# Altium PCB Melon S3 FPGA9.PcbDoc (part 2 of 2)
Units mil, origin at the board's own origin, x right, y up, seen from the top; angles counter-clockwise.
Board outline 2597.73 x 2233.03 mil, 2 copper layers (TopLayer, BottomLayer); 117 components, 166 nets, 594 pads, 168 vias.
Unrouted connection lines stored in the file: 3.
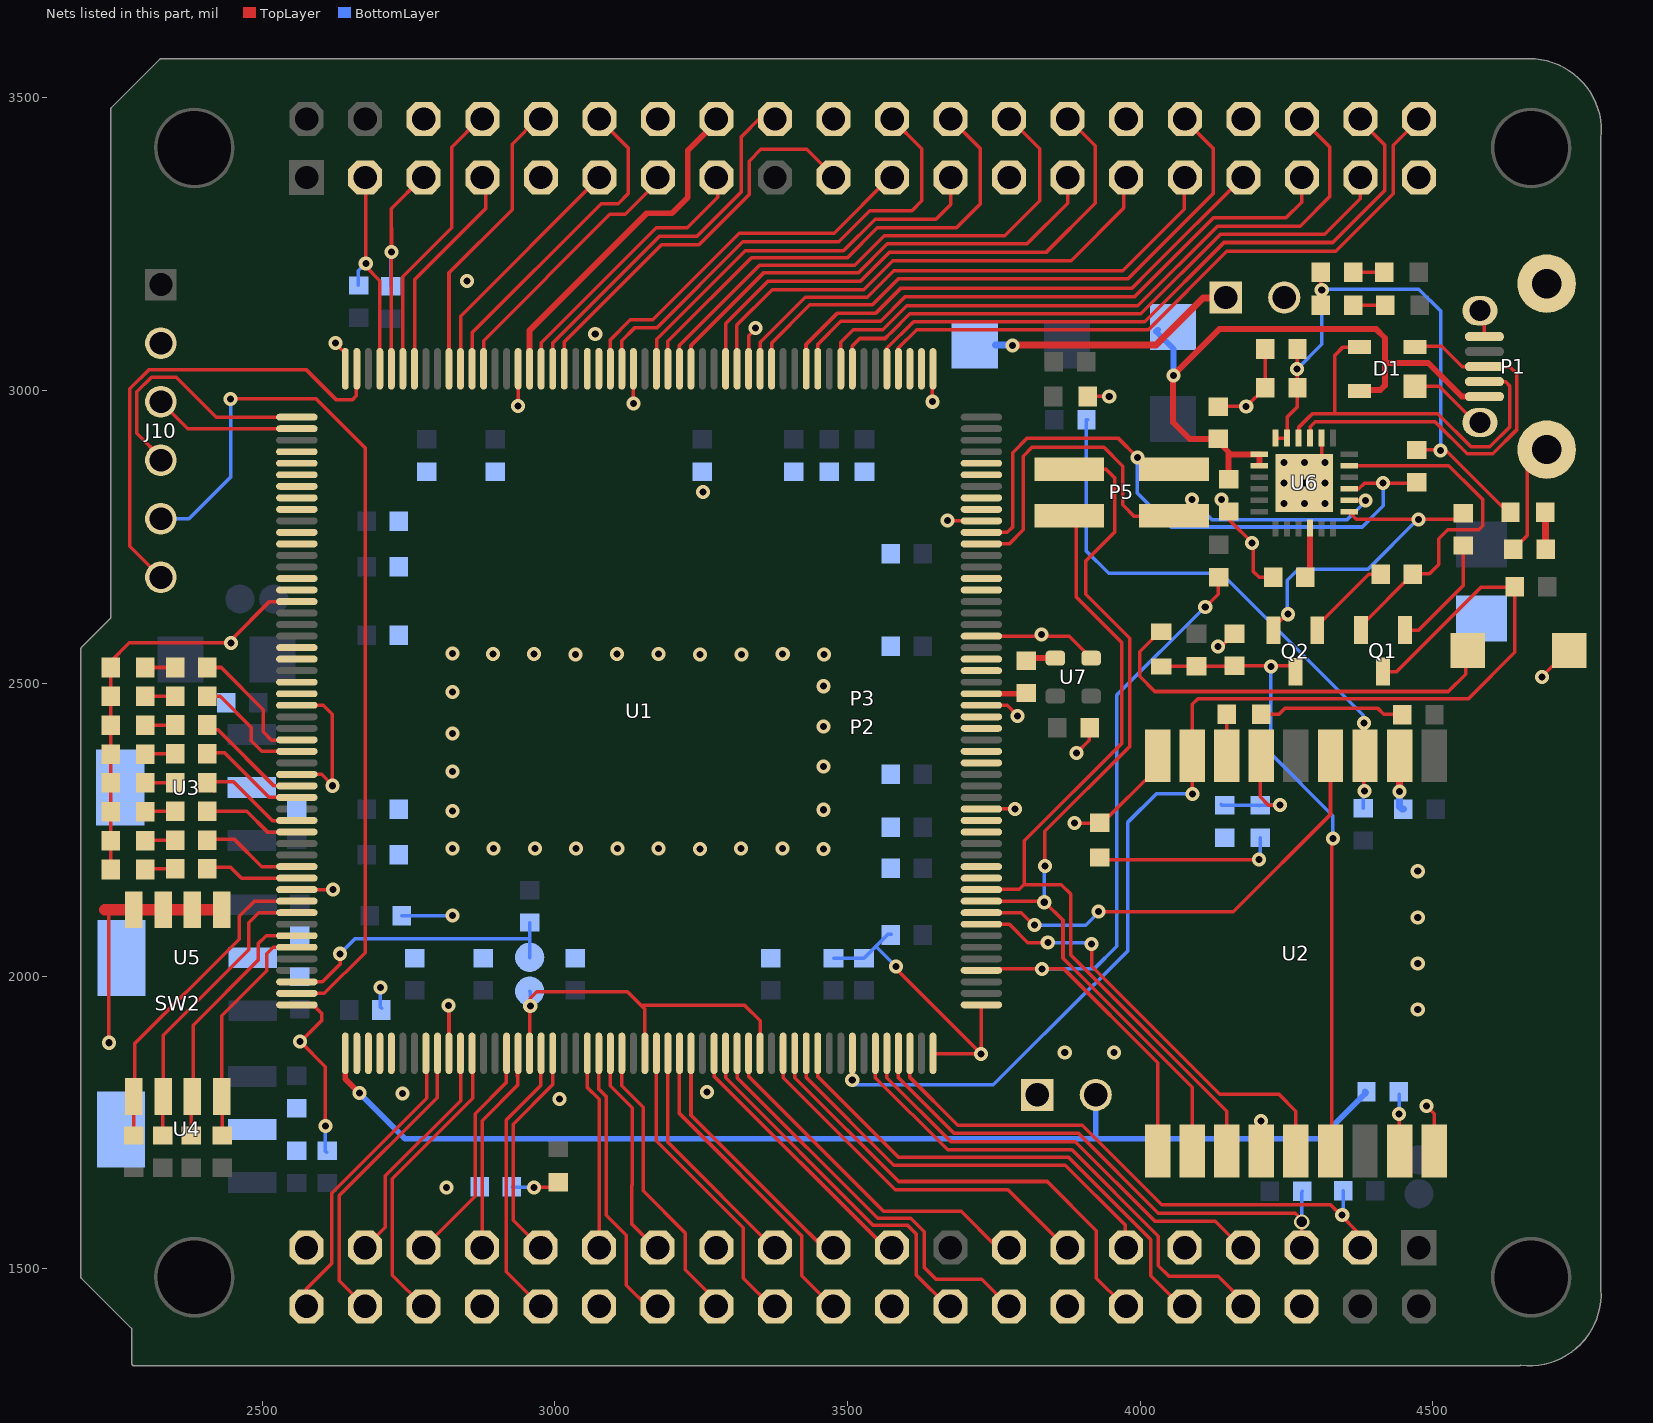
[diagram p2: the nets of this part, all layers, seen from the top]

## Via types
v1: diameter 24, hole 12, TopLayer to BottomLayer, 135 vias
v2: diameter 28, hole 16, TopLayer to BottomLayer, 30 vias
v3: diameter 30, hole 20, TopLayer to BottomLayer, 2 vias
v4: diameter 26, hole 18, TopLayer to BottomLayer, 1 vias

## Nets (pads, with @x,y where several pads share a name; then routed paths per layer and width w, separated by ;. In a path a pad name is that pad's centre, name@x,y a point inside that pad or via, vN(x,y) a via of type N, cw(c..) or ccw(c..) an arc to the next point about the centre after c; other vN are vias at no path point) (continued)
DTR: Q1.2 R18.2 U6.23 | length 600.4
  TopLayer w6: U6.23@4355,2872 U6.23@4355.87,2872.87 ; U6.23@4356.98,2871.76 4527.24,2871.76 4573.5,2825.5 ; Q1.2@4379,2600 4465,2686 R18.2@4465.56,2686 R18.2@4465.56,2687 ; R18.2@4465,2687 R18.2@4465.56,2687 ; 4574,2825 4585,2814 4585,2769 4578,2762 4525,2762 4510,2747 4510,2703 4494,2687 R18.2@4465.56,2687
EN: R1.1 U2.2 | length 101.1
  TopLayer w12: v1(4443,2315) U2.2@4443,2382
  BottomLayer w12: v1(4443,2315) 4443,2289 4447,2285 R1.1@4449.44,2285
ESP_RX: P5.1 U1.62 U2.11 | length 1562.9
  TopLayer w6: U1.62@3728.61,2127.84 3835.16,2127.84 3868,2095 3868,2030.62 3893.31,2005.31 4088.72,1809.89 U2.11@4088.72,1701 ; U1.62@3741,2127 U1.62@3742,2126 ; v1@3837,2189 3837,2247 3982,2392 3982,2577 3907,2652 3907,2709 3956,2758 3956,2851 3941,2866 P5.1@3875,2866
  BottomLayer w6: v1(3836,2126) 3836,2187 v1(3837,2188)
ESP_TX: P5.3 U1.63 U2.12 | length 1434.8
  TopLayer w6: U1.63@3738,2148 3793,2148 3801,2156 3865,2156 3881,2140 3881,2036 4147.78,1769.22 U2.12@4147.78,1701 ; 3802,2157 3802,2231 3968,2397 3968,2570 3891,2647 3891,2783 P5.3@3887,2787
FPGA_CS: Q1.3 R6.1 U1.45 U2.8 | length 2049.3
  TopLayer w6: U2.8@4088,2389 4089,2390 4089,2464 4099,2474 4561,2474 4640,2553 R6.1@4640,2664 ; U2.8@4088.72,2376.2 4088.72,2311.28 v1(4089,2311) ; Q1.3@4414.6,2520.13 4438.13,2520.13 4582,2664 R6.1@4640,2664 ; R6.1@4640,2665 R6.1@4640,2664 ; R6.1@4641,2664 R6.1@4640,2664
  BottomLayer w6: v1(3508,1822) 3508,1814 3749,1814 3920,1985 3921,1985 3979,2043 3979,2263 4027,2311 v1@4088,2311
GCLK: R3.1 U7.3 | length 48.8
  TopLayer w6: R3.1@3807,2541 R3.1@3808.96,2542.96
  TopLayer w10: R3.1@3808.96,2542.96 U7.3@3854.98,2542.96
GND: C1.1 C2.2 C3.2 C4.2 C5.2 C6.2 C7.2 C8.2 C9.2 C10.2 C11.2 C12.2 C13.2 C14.2 C15.2 C17.2 C18.2 C20.2 C21.2 C23.1 C24.2 C25.2 C26.2 C27.2 C28.2 C29.2 C30.2 C31.2 C32.2 C33.2 C34.2 C35.2 C36.2 C37.2 C38.2 C39.2 C40.2 C41.2 D1.1 DC1.C DC2.C DC6.C DC7.C DC8.C DC9.C DC10.C DC11.C DC12.C DC13.C J10.2 JP3.2 P1.1 P1.G1 P1.G2 P1.G3 P1.G4 P2.6 P2.9 P2.14 P2.20 P2.25 P2.30 P2.34 P2.39 P3.6 P3.9 P3.14 P3.20 P3.25 P3.30 P3.34 P3.39 P4.2 P6.1 R9.2 R17.1 R32.2 R33.2 R37.1 SW1.1 SW2.1 SW2.3 SW2.5 SW2.7 U1.10 U1.17 U1.27 U1.37 U1.52 U1.53 U1.70 U1.79 U1.85 U1.95 U1.105 U1.121 U1.131 U1.141 U1.156 U1.173 U1.182 U1.188 U1.198 U1.208 U2.9 U2.13 U2.18 U3.2 U3.4 U4.2 U4.4 U5.2 U5.4 U6.2 U7.2 | length 5122.6
  TopLayer w6: v1(2238,1886) 2238,2112 ; DC1.C@2240,2526 2241.47,2524.53 DC7.C@2241.47,2477.66 DC8.C@2241.47,2428.38 DC9.C@2241.47,2379.11 DC10.C@2241.47,2329.83 DC11.C@2241.47,2280.55 DC12.C@2241.47,2231.28 DC13.C@2241.47,2182 ; DC1.C@2240,2536 2273,2569 v1(2447,2569) ; SW2.1@2281,2110 SW2.1@2284.09,2113.09 ; v1@2447,2572 2447,2574 2512.65,2639.65 U1.173@2559.32,2639.65 ; U1.198@2559.32,2147.53 2621.53,2147.53 v1@2622,2148 ; U1.188@2559.32,2344.38 2601.62,2344.38 2620,2326 2620,2447 2604.51,2462.49 U1.182@2559.32,2462.49 ; v1(2565,1888) v1@2565.5,1887.5 ; U1.208@2590,1951 2590,1948 2602,1936 2602,1924 v1@2565.5,1887.5 ; v1(2608,1744) 2608,1845 v1@2565.5,1887.5 ; v1(2625,3081) 2642,3064 U1.156@2642,3037.29 U1.156@2642,3037 ; v1(2818,1950) 2819.17,1948.83 U1.10@2819.17,1868 ; U1.141@2937.28,3037.29 2937.28,2975.72 v1@2938,2975 ; U1.17@2956.96,1868 v1@2956.96,1949 ; v1(2958,1949) 2958,1962 2969,1973 3124,1973 3150,1947 ; U1.131@3134.13,3037.29 3134.13,2979.87 v1@3135,2979 ; 3150,1948 3153.81,1944.19 U1.27@3153.81,1868 ; 3151,1950 3324,1950 3350.66,1923.34 U1.37@3350.66,1868 ; U1.121@3330.98,3037.29 3330.98,3093.98 v1@3344,3107 ; v1(3583,2016) 3583,2012 v1(3728,1867) ; v1(3645,2981) U1.105@3645,3038 ; U1.52@3647,1868 3648,1867 v1(3728,1867) ; v1(3671,2778) 3728,2778 U1.95@3729,2777 ; U1.70@3728.61,2285.32 3787.68,2285.32 v1@3788,2285 ; U1.79@3728.61,2462.49 3772.51,2462.49 v1@3790,2445 ; U1.85@3728.61,2580.6 3878.4,2580.6 U7.2@3916,2542.96 U7.2@3918,2545 ; U1.53@3730,1951 3728,1949 v1(3728,1867) ; v1(3888,2261) DC2.C@3929,2261 ; v1(3891,2381) 3913,2403 C23.1@3913,2425 ; DC6.C@3910.05,2990 v1(3947,2990) ; DC2.C@3931,2257 4029.67,2355.67 U2.9@4029.67,2376.2 ; C12.2@4132,2973 v1(4181,2973) 4181.44,2973 C3.2@4213.44,3005 ; v1(4133,2563) 4139,2563 C1.1@4161,2585 ; C14.2@4152,2791 4152,2779 v1(4191,2740) 4193,2738 4193,2691 4203,2681 C11.2@4226,2681 ; v1(4206,1752) 4206,1699 U2.13@4207,1698 ; C9.2@4213.44,3071 4213.44,3007.56 C3.2@4216,3005 ; U6.2@4309.74,2919 4309.74,2884.26 U6.2@4316,2878 ; D1.1@4469.24,3007.47 4510.53,3007.47 P1.G3@4573,2945 ; v1(4489,1778) 4502.11,1764.89 U2.18@4502.11,1701 ; P1.G1@4583,3136 4588,3131 P1.1@4588,3092.18 ; R17.1@4637.44,2729 4661,2752.56 4661,2865 P1.G4@4696,2900 ; v1(4686,2511) 4726,2551 SW1.1@4733,2551
  TopLayer w20: 2231,2113.09 SW2.1@2281,2113.09 2284.09,2113.09 SW2.3@2331,2113.09 SW2.5@2381,2113.09 SW2.7@2431,2113.09
  BottomLayer w6: v1(2608,1744) 2608,1701 R32.2@2610,1699 ; v1(2702,1980) 2702,1947 R33.2@2704,1945 ; C17.2@2738.56,2103 2823,2103 v1@2825,2105 ; JP3.2@2957,1974 2958,1973 v1(2958,1949) ; C29.2@3476,2030.56 3527.44,2030.56 C28.2@3528,2030 ; C28.2@3528,2030.56 3568.44,2071 C41.2@3575,2071 ; 3549,2050 v1(3583,2016)
  other v1: 2815,1639 3008,1790 2740,1799 3260,1802 3871,1869 3955,1869 4474,1943 4474,2021 4474,2100 2825,2103 2621,2148 4474,2179 3247.67,2217 3459,2217 2825,2218 2895.44,2218 2965.89,2218 3036.33,2218 3106.78,2218 3177.22,2218 3318.11,2218 3388.56,2218 2825,2282 3459,2284 3786,2285 2620,2325 2825,2349 3459,2358 2825,2414 3459,2426 3790,2444 2825,2485 3459,2495 3035.5,2549 3247.75,2549 3318.5,2549 3460,2549 2894,2550 2964.75,2550 3106.25,2550 3177,2550 3389.25,2550 2825,2551 3831,2583 4245.21,2807.23 4245.21,2807.23 4280.21,2807.23 4280.21,2807.23 4315.21,2807.23 4315.21,2807.23 4139,2814 3253,2827 4245.21,2842.23 4245.21,2842.23 4280.21,2842.23 4315.21,2842.23 4315.21,2842.23 4245.21,2877.23 4245.21,2877.23 4280.21,2877.23 4280.21,2877.23 4315.21,2877.23 2937,2974 3134,2978 3069,3097 3343,3107 2850,3187
INT_B: R15.2 U1.56 U2.10 | length 1371.2
  TopLayer w6: U1.56@3728,2008 3732,2012 v1(3832,2012) 3869.65,2012 4029.67,1851.98 U2.10@4029.67,1701 ; v1(4111,2630) 4133,2652 4133,2683 R15.2@4131.44,2681.44
  BottomLayer w6: v1(3832,2012) 3921,2012 3960,2051 3960,2480 4110,2630 v1(4111,2630)
IO_L01N_0: U1.161
IO_L01N_1: U1.107
IO_L01N_3: U1.3
IO_L01P_0: U1.160
IO_L01P_1: U1.106
IO_L01P_3: U1.2
IO_L02N_0: U1.163
IO_L02N_1: P3.38 U1.109 | length 1141.2
  TopLayer w6: U1.109@3567.2,3037.29 3567.2,3072.2 3612.73,3117.73 4007.73,3117.73 ; 4008,3117.73 4007.73,3117.73 ; P3.38@4371,3466 4418,3419 4418,3342 4329,3253 4143,3253 4007.73,3117.73
IO_L02N_3: U1.5
IO_L02P_0: U1.162
IO_L02P_1: P3.40 U1.108 | length 1129.3
  TopLayer w6: U1.108@3586.88,3037.29 3586.88,3072.88 3618,3104 4014,3104 4148,3238 4334,3238 4432,3336 4432,3419 P3.40@4472,3459
IO_L02P_3: U1.4
IO_L03N_0: U1.165
IO_L03N_1: P3.36 U1.113 | length 1136
  TopLayer w6: U1.113@3488.46,3037.29 3488.46,3082.46 3510,3104 3560.2,3104 3601.2,3145 3996,3145 4132,3281 4273,3281 4324,3332 4324,3416 P3.36@4276,3464
IO_L03N_3: P2.38 U1.9 | length 530.4
  TopLayer w6: P2.38@2675.73,1435.87 2632,1479.6 2632,1625.03 2799,1792.03 U1.9@2799,1879
IO_L03P_0: U1.164
IO_L03P_1: P3.37 U1.112 | length 1046.3
  TopLayer w6: U1.112@3508.14,3037.29 3508.14,3076.14 3521,3089 3564,3089 3573,3098 ; 3573.5,3098.5 3606,3131 4001,3131 4137,3267 4315,3267 4376,3328 P3.37@4376,3364
IO_L03P_3: P2.40 U1.8 | length 517.4
  TopLayer w6: P2.40@2575.73,1435.87 2575.73,1465.73 2619,1509 2619,1629 2781,1791 2781,1865 U1.8@2779.8,1868
IO_L04N_0: U1.168
IO_L04N_1: P3.33 U1.116 | length 885
  TopLayer w6: U1.116@3429,3059 3429,3078.66 3482.85,3132.5 3548.5,3132.5 3591.17,3175.17 3986.37,3175.17 4016.5,3205.3 4016.5,3205.5 4175,3364 P3.33@4176,3364
IO_L04N_3: P2.36 U1.12 | length 507
  TopLayer w6: P2.36@2775.73,1435.87 2722.47,1489.13 2722.47,1653.53 2860,1791.06 2860,1841 2858,1843 U1.12@2858,1863
IO_L04P_0: U1.167
IO_L04P_1: P3.35 U1.115 | length 1011.3
  TopLayer w6: U1.115@3449.09,3037.29 3449.09,3068.91 3449,3069 3449,3078.86 3488.64,3118.5 3556.5,3118.5 3598,3160 3990,3160 4125,3295 4249,3295 4276,3322 P3.35@4276,3364
IO_L04P_3: P2.37 U1.11 | length 399.8
  TopLayer w6: P2.37@2675.73,1535.87 2710.47,1570.61 2710.47,1658.5 2839,1787.03 2839,1866 U1.11@2838.85,1868
IO_L05N_0: U1.172
IO_L05N_1: P3.31 U1.120 | length 918.3
  TopLayer w6: U1.120@3350.66,3037.29 3350.66,3082.66 3427.5,3159.5 3533.5,3159.5 3579,3205 3970,3205 4075,3310 4075,3363 P3.31@4076,3364
IO_L05N_2: U1.65
IO_L05N_3: P2.33 U1.16 | length 379
  TopLayer w6: P2.33@2875.73,1535.87 2875.73,1752.73 2937,1814 U1.16@2937,1855 ; 2936,1828.56 U1.16@2936,1863
IO_L05P_0: U1.171
IO_L05P_1: P3.32 U1.119 | length 1052.7
  TopLayer w6: U1.119@3370.35,3037.29 3370.35,3081.35 3435.5,3146.5 3542.5,3146.5 3587,3191 3979,3191 4125,3337 4125,3413 4075,3463 P3.32@4076,3464
IO_L05P_2: U1.64
IO_L05P_3: P2.35 U1.15 | length 385.9
  TopLayer w6: P2.35@2775.73,1535.87 2863.73,1623.87 2863.73,1764.73 2917,1818 2917,1847 U1.15@2919,1849 ; U1.15@2919,1861 U1.15@2919,1849 ; U1.15@2920,1850 U1.15@2919,1849
IO_L06N_1: P3.28 U1.123 | length 962.5
  TopLayer w6: U1.123@3291.61,3037.29 3291.61,3114.61 3364,3187 3522,3187 3571,3236 3839,3236 3923,3320 3923,3418 P3.28@3873,3468
IO_L06N_2: U1.69
IO_L06N_3: P2.31 U1.19 | length 385.2
  TopLayer w6: P2.31@2975.73,1535.87 2929,1582.6 2929,1747 2996,1814 U1.19@2996,1874
IO_L06P_1: P3.29 U1.122 | length 852
  TopLayer w6: U1.122@3311,3059 3311,3112 3371.5,3172.5 3527.5,3172.5 3577,3222 3882,3222 3972,3312 3972,3363 P3.29@3976,3364
IO_L06P_2: U1.68
IO_L06P_3: P2.32 U1.18 | length 480.9
  TopLayer w6: P2.32@2975.73,1435.87 2917,1494.6 2917,1754 2976,1813 2976,1864 U1.18@2976.65,1868
IO_L07N_0: U1.178
IO_L07N_1: P3.26 U1.127 | length 919.8
  TopLayer w6: U1.127@3212.87,3037.29 3212.87,3077.27 3349.6,3214 3512,3214 3562.56,3264.56 3768.56,3264.56 3828,3324 3828,3413 P3.26@3776,3465
IO_L07N_3: P2.28 U1.23 | length 488.4
  TopLayer w6: U1.23@3075.07,1868 3075.07,1806.9 3087.73,1794.24 3087.73,1591.27 3122,1557 3122,1472 3160,1434 3177,1434 P2.28@3175.73,1435.87
IO_L07P_0: U1.177
IO_L07P_1: P3.27 U1.126 | length 816.9
  TopLayer w6: U1.126@3232.55,3037.29 3232.55,3077.16 3356.4,3201 3518,3201 3567.56,3250.56 3806.56,3250.56 3876,3320 3876,3350 P3.27@3879,3350
IO_L07P_3: P2.29 U1.22 | length 340.7
  TopLayer w6: U1.22@3055.39,1868 3055,1864 3055,1810 3075.73,1789.27 P2.29@3075.73,1535.87
IO_L08N_0: U1.181
IO_L08N_1: P3.23 U1.129 | length 694.3
  TopLayer w6: U1.129@3174,3037 3174,3088 3325,3239 3493,3239 3547,3293 3651,3293 3676,3318 P3.23@3676,3364
IO_L08N_2: U1.75
IO_L08N_3: P2.26 U1.25 | length 501
  TopLayer w6: U1.25@3114.44,1868 3114.44,1812.56 3151,1776 3151,1633 3223,1561 3223,1498 3274,1447 3274,1435 P2.26@3275.73,1435.87
IO_L08P_0: U1.180
IO_L08P_1: P3.24 U1.128 | length 825.5
  TopLayer w6: U1.128@3193,3056 3193,3084 3336,3227 3500,3227 3551,3278 3686,3278 3727,3319 3727,3413 P3.24@3676,3464
IO_L08P_2: U1.74
IO_L08P_3: P2.27 U1.24 | length 368.5
  TopLayer w6: U1.24@3094.76,1868 3094.76,1812.24 3132,1775 3132,1642.97 3131.76,1642.73 3131.76,1576.24 3173,1535 P2.27@3175.73,1535.87
IO_L09N_1: P3.21 U1.133 | length 645.7
  TopLayer w6: U1.133@3095,3037 3095,3087 3129,3121 3167,3121 3315,3269 3477,3269 3572,3364 P3.21@3576,3364
IO_L09N_2: U1.78
IO_L09N_3: P2.23 U1.29 | length 413.6
  TopLayer w6: U1.29@3193.18,1868 3193.18,1715.82 P2.23@3378,1531
IO_L09P_1: P3.22 U1.132 | length 823.5
  TopLayer w6: U1.132@3115,3035 3114,3036 3114,3085 3136,3107 3174,3107 3321,3254 3485,3254 3538,3307 3610,3307 3627,3324 3627,3413 P3.22@3576,3464
IO_L09P_2: U1.77
IO_L09P_3: P2.24 U1.28 | length 521.6
  TopLayer w6: U1.28@3173.5,1868 3173.5,1718.5 3322,1570 3322,1484 3373,1433 P2.24@3375.73,1435.87
IO_L10N_0: R25.2 U1.186 | length 207.5
  TopLayer w6: R25.2@2404,2479 R25.2@2405.85,2477.15 ; R25.2@2406.56,2477.86 2428.14,2477.86 2481,2425 2481,2403 ; 2480.5,2402.5 2499.25,2383.75 U1.186@2559.32,2383.75
IO_L10N_1: U1.135
IO_L10N_3: P2.21 U1.31 | length 445.8
  TopLayer w6: U1.31@3232.55,1868 3232.55,1762.42 3434,1560.97 ; 3434.03,1560.97 3459,1536 P2.21@3479,1536
IO_L10P_0: R24.2 U1.185 | length 210.1
  TopLayer w6: R24.2@2406.56,2527 2430,2527 2502,2455 2502,2417 2516,2403 U1.185@2543,2403
IO_L10P_1: U1.134
IO_L10P_3: P2.22 U1.30 | length 542.7
  TopLayer w6: U1.30@3212.87,1868 3212.87,1765.13 3422,1556 3422,1488 3475,1435 P2.22@3475.73,1435.87
IO_L11N_0: R27.2 U1.190 | length 189.1
  TopLayer w6: R27.2@2406.56,2379.57 2410,2377 2410,2381 2436,2381 2511.99,2305.01 U1.190@2559.32,2305.01
IO_L11N_1: P3.18 U1.138 | length 644.1
  TopLayer w6: U1.138@2996.33,3037.29 2996.33,3081.33 3179,3264 3243,3264 3318,3339 3318,3433 3352,3467 3378,3467 P3.18@3376,3464
IO_L11N_2: U1.83
IO_L11N_3: P2.18 U1.34 | length 627.7
  TopLayer w6: U1.34@3291.61,1868 3291.61,1826.36 3544.05,1573.92 3603.08,1573.92 3617,1560 3617,1490 3671,1436 P2.18@3675,1436
IO_L11P_0: R26.2 U1.189 | length 202.8
  TopLayer w6: R26.2@2406.56,2428.71 2410,2426 2410,2424 2407,2421 2424,2421 2520.31,2324.69 U1.189@2559.32,2324.69
IO_L11P_1: P3.19 U1.137 | length 697.4
  TopLayer w6: U1.137@3016.02,3037.29 3016.02,3083.02 3182.2,3249.2 3246.2,3249.2 3332,3335 3332,3392 3352,3412 3430,3412 3471,3371 P3.19@3471,3361
IO_L11P_2: U1.82
IO_L11P_3: P2.19 U1.33 | length 465.1
  TopLayer w6: U1.33@3271.92,1868 3271.92,1829.08 3564,1537 3576,1537 P2.19@3575.73,1535.87
IO_L12N_0: R29.2 U1.193 | length 182
  TopLayer w6: R29.2@2417.68,2290.7 R29.2@2406.56,2281.29 2473.71,2281.29 2509.05,2245.95 U1.193@2559.32,2245.95
IO_L12N_1: P3.16 U1.140 | length 589.8
  TopLayer w10: U1.140@2956.96,3037.29 2956.96,3102.96 3157,3303 3200,3303 3227,3330 3227,3410 3275,3458 3275,3467 P3.16@3276,3464
IO_L12N_3: P2.15 U1.36 | length 613.7
  TopLayer w6: U1.36@3330.98,1868 3330.98,1828.35 3561.41,1597.92 3694.08,1597.92 3754,1538 3780,1538 P2.15@3775.73,1535.87
IO_L12P_0: R28.2 U1.192 | length 211.8
  TopLayer w6: R28.2@2405,2336 R28.2@2409,2332 ; R28.2@2406.56,2330.43 2407.99,2331.35 R28.2@2409,2332 ; R28.2@2417,2316 R28.2@2417,2332 ; U1.192@2559.32,2265.64 2517.36,2265.64 2451,2332 R28.2@2417,2332 ; R28.2@2409,2332 R28.2@2417,2332 ; R28.2@2409,2332 2410,2333 2417,2333 R28.2@2417,2332
IO_L12P_1: P3.15 U1.139 | length 477.6
  TopLayer w6: U1.139@2976.65,3037.29 2976.65,3081.65 3173,3278 3226,3278 3278,3330 P3.15@3278,3359
IO_L12P_3: P2.16 U1.35 | length 703
  TopLayer w6: U1.35@3311.29,1868 3311.29,1825.88 3551.25,1585.92 3608.05,1585.92 3631,1562.97 3631,1502 3651,1482 3729,1482 P2.16@3775,1436
IO_L13N_0: R31.2 U1.197 | length 161.9
  TopLayer w6: R31.2@2406,2182 2406.48,2182.85 R31.2@2406.56,2183 ; R31.2@2408,2182 2412,2186 2446,2186 2464.79,2167.21 U1.197@2559.32,2167.21
IO_L13N_1: P3.12 U1.145 | length 598.6
  TopLayer w6: U1.145@2858.54,3037.29 2858.54,3098.54 3079,3319 3108,3319 3125,3336 3125,3415 P3.12@3076,3464 3074,3463 P3.12@3074,3441
IO_L13N_2: U1.90
IO_L13N_3: P2.12 U1.40 | length 808.3
  TopLayer w6: U1.40@3409.72,1868 3409.72,1826.46 3587.18,1649 3841,1649 3925,1565 3925,1484 P2.12@3969,1440
IO_L13P_0: R30.2 U1.196 | length 172.2
  TopLayer w6: R30.2@2407,2233 2408,2234 2452,2234 2499.1,2186.9 U1.196@2559.32,2186.9
IO_L13P_1: P3.13 U1.144 | length 470.9
  TopLayer w6: U1.144@2878.22,3037.29 2878.22,3085.22 3094,3301 3120,3301 3175,3356 P3.13@3175,3370
IO_L13P_2: U1.89
IO_L13P_3: P2.13 U1.39 | length 647.4
  TopLayer w6: U1.39@3390.03,1868 3390.03,1826.35 3581.38,1635 3774,1635 3872,1537 P2.13@3875.73,1535.87
IO_L14N_0: R23.2 SW2.4 U1.200 | length 511.2
  TopLayer w6: SW2.4@2328,1790 2330,1788 R23.2@2330,1727.56 ; SW2.4@2331,1793 SW2.4@2331,1794 2331,1899 2477,2045 2477,2091 2494.16,2108.16 U1.200@2559.32,2108.16
IO_L14N_1: P3.10 U1.147 | length 490.6
  TopLayer w6: U1.147@2819.17,3037.29 2819.17,3201.17 2927,3309 2927,3421 P3.10@2971,3465
IO_L14N_3: P2.10 U1.42 | length 853
  TopLayer w6: U1.42@3449.09,1868 3449.09,1828.35 3587.43,1690 3877.9,1690 4018,1549.9 4018,1488 4057,1449 P2.10@4069,1449
IO_L14P_0: R22.2 SW2.2 U1.199 | length 562.3
  TopLayer w6: SW2.2@2277,1799 2281,1795 SW2.2@2281,1794 R22.2@2281,1727.56 ; SW2.2@2282,1796 2282,1884 2461,2063 2461,2102 2486.84,2127.84 U1.199@2559.32,2127.84
IO_L14P_1: P3.11 U1.146 | length 424.9
  TopLayer w6: U1.146@2838.85,3037.29 U1.146@2838.85,3038 ; U1.146@2839,3038 2839,3127 P3.11@3076,3364
IO_L14P_3: P2.11 U1.41 | length 733.8
  TopLayer w6: U1.41@3429.4,1868 3429.4,1826.57 3578.98,1677 3872,1677 3974,1575 3974,1534 P2.11@3975.73,1535.87
IO_L15N_0: R36.2 SW2.8 U1.203 | length 403.3
  TopLayer w6: SW2.8@2431,1793 SW2.8@2431,1794 2431,1932 2508,2009 2508,2038 2519.1,2049.1 U1.203@2559.32,2049.1 ; R36.2@2432,1727.56 SW2.8@2432,1798
IO_L15N_1: P3.8 U1.151 | length 485.9
  TopLayer w6: U1.151@2740.43,3037.29 2740.43,3194.43 2824,3278 2824,3416 2873,3465 2874,3465 P3.8@2876,3464
IO_L15N_2: U1.97
IO_L15N_3: P2.7 U1.48 | length 771
  TopLayer w6: U1.48@3567.2,1868 3567.2,1826.46 3676.66,1717 3889.08,1717 4025.08,1581 4128,1581 4174,1535 P2.7@4175.73,1535.87
IO_L15P_0: R35.2 SW2.6 U1.202 | length 447.3
  TopLayer w6: R35.2@2379,1727.56 2379,1790 SW2.6@2381,1792 ; SW2.6@2382,1791 2382,1916 2493,2027 2493,2055 2506.79,2068.79 U1.202@2559.32,2068.79
IO_L15P_1: P3.7 U1.150 | length 377.1
  TopLayer w6: U1.150@2761,3035 2761,3190 2882,3311 P3.7@2882,3360 ; P3.7@2882,3364 P3.7@2882,3366
IO_L15P_2: U1.96
IO_L15P_3: P2.8 U1.47 | length 867.7
  TopLayer w6: U1.47@3547.51,1868 3547.51,1826.35 3670.86,1703 3883.28,1703 4031,1555.28 4031,1505 4049,1487 4133,1487 4178,1442 4178,1439 P2.8@4175.73,1435.87
IO_L16N_1: P3.3 R4.1 U1.153 | length 387.9
  TopLayer w6: P3.3@2676,3363 2667,3354 2677,3344 v1(2677,3217) 2677,3212 2701.06,3187.94 U1.153@2701.06,3037.29
  BottomLayer w6: R4.1@2664,3180 2664,3205 2677,3218 v1(2677,3217)
IO_L16N_2: U1.100
IO_L16N_3: P2.3 R20.1 U1.50 | length 1008.8
  TopLayer w6: U1.50@3606.57,1868 3606.57,1826.69 3688.25,1745 3900.68,1745 4036.68,1609 4325,1609 P2.3@4387,1547 ; P2.3@4349,1540 4375,1540 P2.3@4375,1535
  BottomLayer w6: v1@4346,1593 4346.44,1593.44 R20.1@4346.44,1633
  other v1: 4345,1592
IO_L16P_1: P3.5 R19.1 U1.152 | length 458.2
  TopLayer w6: U1.152@2720.74,3037.29 2720.74,3310.74 2774,3364 P3.5@2776,3364 ; v1(2721,3237) 2721,3277
  BottomLayer w6: R19.1@2720,3178 2720,3235 v1@2721,3236 ; v1(2721,3237) v1@2721,3246
IO_L16P_2: U1.99
IO_L16P_3: P2.5 R21.1 U1.49 | length 931.8
  TopLayer w6: U1.49@3586.88,1868 3586.88,1826.57 3682.46,1731 3894.88,1731 4030.88,1595 4265,1595 4275.73,1584.27 v4@4275.73,1579.27 ; P2.5@4275.73,1535.87 v4@4275.73,1579.27 ; v4@4276,1579 v4@4275.73,1579.27
  BottomLayer w6: v4(4276,1580) 4276,1631 R21.1@4277,1632
LED1: DC15.C U2.7 | length 74.2
  TopLayer w6: DC15.C@4147.47,2447 4147.47,2373.53 U2.7@4148,2373
MOSI: U1.61 U2.4 | length 788.2
  TopLayer w6: U1.61@3728.61,2108.16 3796.84,2108.16 3818,2087 v1(3819,2087) ; v1(3929,2110) 4159,2110 4324.95,2275.95 U2.4@4324.95,2376.2
  BottomLayer w6: v1@3815,2087 v1(3819,2087) 3907,2087 3929,2109 v1(3929,2110)
NetD5_1: D5.1 P4.1 | length 426.6
  TopLayer w12: v1@3781,3078 4027,3078 4107,3158 P4.1@4145,3158
  BottomLayer w10: v1@3781,3078 v1(3782,3077)
  BottomLayer w12: D5.1@3753,3078 v1@3781,3078
NetDC1_A: DC1.A R24.1 | length 51.9
  TopLayer w6: DC1.A@2300,2526 2301,2527 R24.1@2351.44,2527
NetDC2_A: DC2.A R7.2 | length 308.3
  TopLayer w6: DC2.A@3933,2199 v1(4203,2199)
  BottomLayer w6: v1(4203,2199) 4205,2201 R7.2@4205,2236.44
NetDC3_A: DC3.A R11.1 | length 52.9
  TopLayer w6: R11.1@4363.56,3202 DC3.A@4416.47,3202
NetDC4_C: DC4.C R17.2 | length 67.6
  TopLayer w12: DC4.C@4691,2796 4692.56,2794.44 R17.2@4692.56,2729
NetDC5_A: DC5.A R13.1 | length 54.9
  TopLayer w6: R13.1@4363.56,3146 DC5.A@4418.47,3146
NetDC7_A: DC7.A R25.1 | length 47.3
  TopLayer w6: DC7.A@2305,2480 2307.14,2477.86 R25.1@2351.44,2477.86
NetDC8_A: DC8.A R26.1 | length 55.4
  TopLayer w6: DC8.A@2300.53,2428.38 2301,2432 2304.29,2428.71 R26.1@2351.44,2428.71
NetDC9_A: DC9.A R27.1 | length 58
  TopLayer w6: DC9.A@2300.53,2379.11 2299,2383 2302.43,2379.57 R27.1@2351.44,2379.57
NetDC10_A: DC10.A R28.1 | length 45.4
  TopLayer w6: DC10.A@2307,2328 2309.43,2330.43 R28.1@2351.44,2330.43
NetDC11_A: DC11.A R29.1 | length 55
  TopLayer w6: DC11.A@2300.53,2280.55 2301,2284 2303.71,2281.29 R29.1@2351.44,2281.29
NetDC12_A: DC12.A R30.1 | length 54.1
  TopLayer w6: DC12.A@2300.53,2231.28 2301,2229 2304.14,2232.14 R30.1@2351.44,2232.14
NetDC13_A: DC13.A R31.1 | length 54.9
  TopLayer w6: DC13.A@2297,2182 2298,2183 R31.1@2351.44,2183
NetDC14_C: DC14.C R37.2 | length 80.4
  TopLayer w6: v1(2964,1639) 3006,1639 DC14.C@3007,1640
  BottomLayer w6: R37.2@2927,1639 v1(2964,1639)
NetDC15_A: DC15.A R39.2 | length 237.8
  TopLayer w6: DC15.A@4206.53,2447 4237,2447 4247,2457 4406,2457 4416,2447 R39.2@4436,2447
NetJP3_1: JP3.1 R38.1 U1.206 | length 497.3
  TopLayer w6: U1.206@2559.32,1990.05 2603.05,1990.05 2633,2020 v1@2633,2037
  BottomLayer w6: v1(2633,2038) 2659,2064 2957,2064 ; JP3.1@2957,2031.56 JP3.1@2957,2032 2957,2064 ; R38.1@2957,2091 2957,2064
NetQ1_1: Q1.1 R12.1 | length 199.9
  TopLayer w6: Q1.1@4453,2591 4476,2591 4552,2667 R12.1@4552,2735.44
  TopLayer w12: Q1.1@4451,2591 Q1.1@4452,2591
NetQ2_1: Q2.1 R18.1 | length 154.7
  TopLayer w6: Q2.1@4300,2596 4303,2599 4390,2686 R18.1@4410.44,2686
  TopLayer w10: Q2.1@4303,2592 Q2.1@4303,2599
NetR3_2: R3.2 U1.80 | length 78.4
  TopLayer w10: U1.80@3728.61,2482.17 R3.2@3807,2482.17
NetR34_1: R34.1 SW1.2 | length 713.3
  TopLayer w6: R34.1@4034,2587 R34.1@4033,2588 ; R34.1@4036,2589 4034,2589 R34.1@4033,2588 ; SW1.2@4556,2554 4556,2515.61 4526.39,2486 4025,2486 3999,2512 3999,2554 R34.1@4033,2588
PROG: R14.2 U2.17 | length 67
  TopLayer w6: U2.17@4442,1731 v1(4442,1764)
  BottomLayer w6: v1(4442,1764) R14.2@4442,1798
PROG_B: P6.2 R14.1 U1.1 | length 1942.4
  TopLayer w10: U1.1@2642,1868 2642,1824 v1(2666,1800)
  BottomLayer w6: 3924,1724 3925,1723
  BottomLayer w10: v1(2666,1800) 2744,1722 4307,1722 R14.1@4384,1799 ; 3924,1724 P6.2@3924,1797 ; R14.1@4384,1798 R14.1@4384,1799 ; R14.1@4384,1803 R14.1@4384,1799 ; R14.1@4386,1801 R14.1@4384,1799
RST: C1.2 Q2.3 R8.1 R34.2 U2.15 | length 1106.7
  TopLayer w6: R34.2@4036,2528.94 R8.1@4096,2528.94 ; R8.1@4096,2529.44 C1.2@4157.56,2529.44 ; C1.2@4161,2529.88 v1@4224.88,2529.88 ; v1(4223,2529) 4224,2529 v1@4224.88,2529.88 ; Q2.3@4263,2522 4255.12,2529.88 v1@4224.88,2529.88 ; U2.15@4324.95,1701 4327,1703.05 4327,2237 v1(4329,2235)
  BottomLayer w6: v1(4223,2529) 4223,2380 4329,2274 v1(4329,2235)
RTS: Q2.2 R12.2 U6.19 | length 560.5
  TopLayer w6: Q2.2@4227.6,2590.43 4227.6,2595.6 4250,2618 v1(4252,2618) ; U6.19@4357,2792 4369,2780 v1(4475,2780) 4546,2780 R12.2@4548,2782 ; U6.19@4356.98,2793.02 U6.19@4357.5,2792.5
  BottomLayer w6: v1@4251,2619 4251,2676 4270,2695 4389,2695 4474,2780 v1(4475,2780)
SCLK: R2.2 R5.1 U2.3 | length 976.4
  TopLayer w6: v1(4382,2432) 4382,2317 v1(4383,2316)
  BottomLayer w6: R2.2@3908.12,2950 3910,2950 3908,2948 3908,2726 3946,2688 4138.3,2688 4381,2445.3 4381,2443.3 4382,2442.3 v1(4382,2432) ; R5.1@4381,2286.56 4381,2314 v1(4383,2316)
STATUS: R7.1 R9.1 U2.6 | length 209.4
  TopLayer w6: U2.6@4205,2373 4205,2306 4219,2292 v1(4239,2292)
  BottomLayer w6: R9.1@4138,2293 4139.44,2291.56 R9.1@4144,2291.56 R7.1@4203.56,2291.56 ; R7.1@4203,2291 R7.1@4203.56,2291.56 ; v1(4239,2292) 4204,2292 R7.1@4203.56,2291.56
TCK: J10.3 U1.158 | length 243.9
  TopLayer w6: J10.3@2327,2981 2373,2935 2549,2935 U1.158@2551,2933
TDI: J10.5 U1.207 | length 1567.1
  TopLayer w6: J10.5@2327,2781 2328,2782 J10.5@2342,2782 ; v1(2446,2986) 2592,2986 2676,2902 2676,2040 2606.36,1970.36 U1.207@2559.32,1970.36
  BottomLayer w6: J10.5@2330,2781 2375,2781 2446,2852 v1(2446,2986)
TDO: J10.4 U1.157 | length 449.4
  TopLayer w6: J10.4@2327,2881 2329,2884 2286,2927 2286,2998 2311,3023 2353,3023 2421.39,2954.61 U1.157@2559.32,2954.61 U1.157@2557.94,2956
TMS: J10.6 U1.155 | length 802.9
  TopLayer w6: J10.6@2327,2681 2274,2734 2274,3003 2307,3036 2575,3036 2627,2984 2654,2984 2661,2991 2661,3022 U1.155@2663,3024
USB_DN: D1.3 P1.4 U6.4 | length 678
  TopLayer w6: U6.4@4270.37,2919 4270.37,2936.9 4287.47,2954 4294.13,2960.66 4508.34,2960.66 4565,2904 4597.03,2904 4631.46,2938.43 4631.46,3007.54 4624,3015 P1.4@4609,3015 ; 4332,2961 4332,3060 4346.4,3074.4 D1.3@4374.76,3074.4 ; D1.3@4376,3073 D1.3@4376.18,3072.82 ; P1.4@4580,3016 P1.4@4580.59,3015.41 ; P1.4@4581,3015 P1.4@4580.59,3015.41 ; P1.4@4588,3015.41 P1.4@4580.59,3015.41
USB_DP: D1.2 P1.3 U6.3 | length 697.4
  TopLayer w6: U6.3@4290.06,2919 4290.06,2938.2 4298.86,2947 4503.53,2947 4558.53,2892 4602,2892 4643.46,2933.46 4643.46,3028.54 4631,3041 P1.3@4590,3041 ; D1.2@4475,3076 4515,3076 4550,3041 P1.3@4588,3041
USB_RX: P5.4 U1.93 U6.20 | length 973.4
  TopLayer w6: U1.93@3727,2738 3776,2738 3800,2762 3800,2888 3815,2903 3938,2903 3970,2871 3970,2805 3990,2785 P5.4@4038,2785 ; U1.93@3728.61,2738.08 U1.93@3761.06,2738.08 ; P5.4@4063,2784 4066,2781 4088,2803 v1(4088,2814) ; U6.20@4356.98,2812.7 v1@4384.7,2812.7
  BottomLayer w6: v1(4088,2814) 4123,2779 4353,2779 v1@4386,2812
  other v1: 4385,2812
USB_TX: P5.2 R10.1 U1.94 U6.21 | length 1145.1
  TopLayer w6: U1.94@3728.61,2757.76 3772.76,2757.76 3782,2767 3782,2894 3807,2919 3962,2919 v1(3995,2886) 4006,2875 P5.2@4033,2875 ; U6.21@4356.98,2832.39 4373.39,2832.39 4383,2842 v1(4415,2842) 4474,2842 R10.1@4475,2843
  BottomLayer w6: v1(3995,2886) 3995,2825 4053,2767 4379,2767 4415,2803 v1(4415,2842)
VALID: U1.60 U2.14 | length 759.9
  TopLayer w6: U1.60@3728.61,2088.47 3776.53,2088.47 3808,2057 v1(3842,2057) ; v1(3917,2055) 3917,2016.97 3926.49,2007.49 4135.97,1798 4237,1798 4265.89,1769.11 U2.14@4265.89,1701
  BottomLayer w6: v1(3842,2057) 3915,2057 v1(3917,2055)
VDDUSB: C12.1 C14.1 D1.4 D4.1 P1.5 U6.7 U6.8 | length 1122.2
  TopLayer w10: v1@4056,3024 4056,2946 4084.56,2917.44 C12.1@4133,2917.44 ; v1@4057,3027 4135,3105 4403,3105 4418,3090 4418,3047 ; C12.1@4133,2913 4155,2891 U6.7@4201.2,2891 ; C14.1@4151,2848.56 4151,2894 ; U6.8@4203.44,2871.76 4203.44,2890.44 U6.7@4204,2891 ; D1.4@4374,3001 4410,3001 4418,3009 4418,3047 ; P1.5@4588,2989.82 4549.18,2989.82 4492,3047 4418,3047
  BottomLayer w10: D4.1@4030,3104 4027,3101 4057,3071 v1(4057,3026)
VIO: C3.1 C9.1 DC4.A R10.2 R11.2 R13.2 U6.5 U6.6 | length 1053.9
  TopLayer w6: U6.6@4231,2919 U6.5@4250.69,2919 4250.69,2954.69 4268,2972 C3.1@4268,3005 ; C3.1@4268.56,3005 C9.1@4268.56,3071 ; R13.2@4308.44,3146 R11.2@4308.44,3202 ; R10.2@4472,2898.56 4512.44,2898.56 v1(4513,2898) ; v1@4514,2906 4628,2792 DC4.A@4632.47,2792
  BottomLayer w6: v1@4267,3036 v1(4268,3037) 4310,3079 v1(4310,3172) ; v1@4308,3173 4476,3173 4513,3136 v1(4513,2898)
VPP: C11.1 U6.16 | length 87.2
  TopLayer w10: C11.1@4281,2682 4290.06,2691.06 U6.16@4290.06,2765.46
pads on no net: P1.2 P2.MT1 P3.MT1 U1.6 U1.14 U1.20 U1.26 U1.32 U1.43 U1.51 U1.54 U1.55 U1.57 U1.58 U1.71 U1.72 U1.76 U1.91 U1.98 U1.101 U1.102 U1.110 U1.118 U1.124 U1.130 U1.136 U1.142 U1.148 U1.154 U1.159 U1.169 U1.174 U1.175 U1.179 U1.183 U1.184 U1.187 U1.194 U1.204 U1.205 U6.1 U6.9 U6.10 U6.11 U6.12 U6.15 U6.17 U6.18 U6.22 U6.24

## Polygon pours and split planes (outlines as drawn)
GND on BottomLayer "TopLayer-GND" (solid, remove dead copper, pour order 2): 2506,3556 2506,3281 2502,3277 2250,3277 2250,2609 2198,2557 2198,1606 2194,1602 2518,1602 2518,1347 2522,1343 4556,1343 4556,2399 4783,2399 4783,3281 4775,3289 4540,3289 4540,3552 4544,3556
GND on TopLayer "TopLayer-GND" (solid, remove dead copper, pour order 0): 2510,3560 2510,3279 2506,3275 2251,3275 2251,2616 2193,2558 2193,1604 2519,1604 2523,1600 2523,1336 4556,1336 4556,2400 4782,2400 4782,3286 4540,3286 4540,3560

## Keep-outs
KeepOutLayer:
  lines w10: 2245,2608 2193,2556 2193,1487 2282,1398 2282,1339 4647,1339 ; 2246,2609 2246,3480 2328,3562 4663,3562 ; 4649.33,1339.95 ccw(c4664.21,1457.01) 4782,1464 ; 4657.72,3561.69 cw(c4664.71,3443.9) 4782,3431 ; 4782,1468 4782,3443

## Other copper
BottomLayer:
  region net GND: 4342,2907 4218,2907 4218,2794 4342,2794

## Silkscreen, mask and mechanical layers (free items; w line width, h text height)
TopOverlay:
  drawing of 842 lines, arcs and shapes, not listed
  text "2" at 2507,3455 h25
  text "40" at 4533,3455 h25
  text "39" at 4533,3357 h25
  text "1" at 2514,3354 h25
  text "P2" at 2545,3248 h47.24
  text "JTAG" at 2262,3231 h47.24
  text "Q-Wave Systems Co.,Ltd" at 3218,3228 h25
  text "VIN" at 4135,3204 h47.24
  text "RX" at 4511,3193 h20
  text "Copyright 2017" at 3218,3165 h25
  text "+5V" at 4029,3163 h25
  text "TX" at 4509,3132 h25
  text "RX" at 3772,2853 h25
  text "USB" at 4660,2819 h20
  text "TX" at 3770,2773 h25
  text "ESP-PROG" at 3854,2675 h47.24
  text "LEDs" at 2255,2552 h47.24
  text "7" at 2439,2513 h25
  text "LED1" at 4141,2475 h20
  text "6" at 2438,2467 h25
  text "RST" at 4602,2434 h47.24
  text "5" at 2438,2415 h25
  text "4" at 2437,2367 h25
  text "3" at 2437,2318 h25
  text "STATE" at 3892,2300 h20
  text "2" at 2437,2267 h25
  text "1" at 2442,2220 h25
  text "0" at 2437,2171 h25
  text "U1" at 3608,1939 h40
  text "U2" at 4007,1764 h40
  text "SWs" at 2464,1763 h47.24
  text "XSTOP" at 3807,1706 h47.24
  text "Melon S3 FPGA" at 2988,1631 h100
  text "1" at 2278,1622 h25
  text "2" at 2326,1622 h25
  text "3" at 2373,1622 h25
  text "4" at 2422,1622 h25
  text "P1" at 4426,1589 h47.24
  text "1" at 4543,1522 h25
  text "39" at 2471,1520 h25
  text "2" at 4541,1423 h25
  text "40" at 2472,1420 h25
  text "V1.10" at 2315,1362 h25
BottomOverlay:
  drawing of 733 lines, arcs and shapes, not listed
  text "3V3" at 2427,3169 h20
  text "GND" at 2427,3067 h20
  text "TCK" at 2427,2969 h20
  text "TDO" at 2426,2867 h20
  text "TDI" at 2420,2768 h20
  text "TMS" at 2427,2670 h20
  text "www.qwavesys.com" at 3408,2283 h70
  text "HSWAP" at 3024,1873 h47.24

## Text inside footprints (layer, text, board x,y; h text height)
P2: Mechanical2 "1" at 4495.73,1650.87 h77.5 r180
P3: Mechanical2 "1" at 2556,3249 h77.5